# Altium PCB PCB_工训pcb_2_2024-10-31.pcbdoc
Units mm, origin at the board's own origin, x right, y up, seen from the top; angles counter-clockwise.
Board outline 318.03 x 147.95 mm, 2 copper layers (Top Layer, Bottom Layer); 28 components, 76 nets, 177 pads, 15 vias.
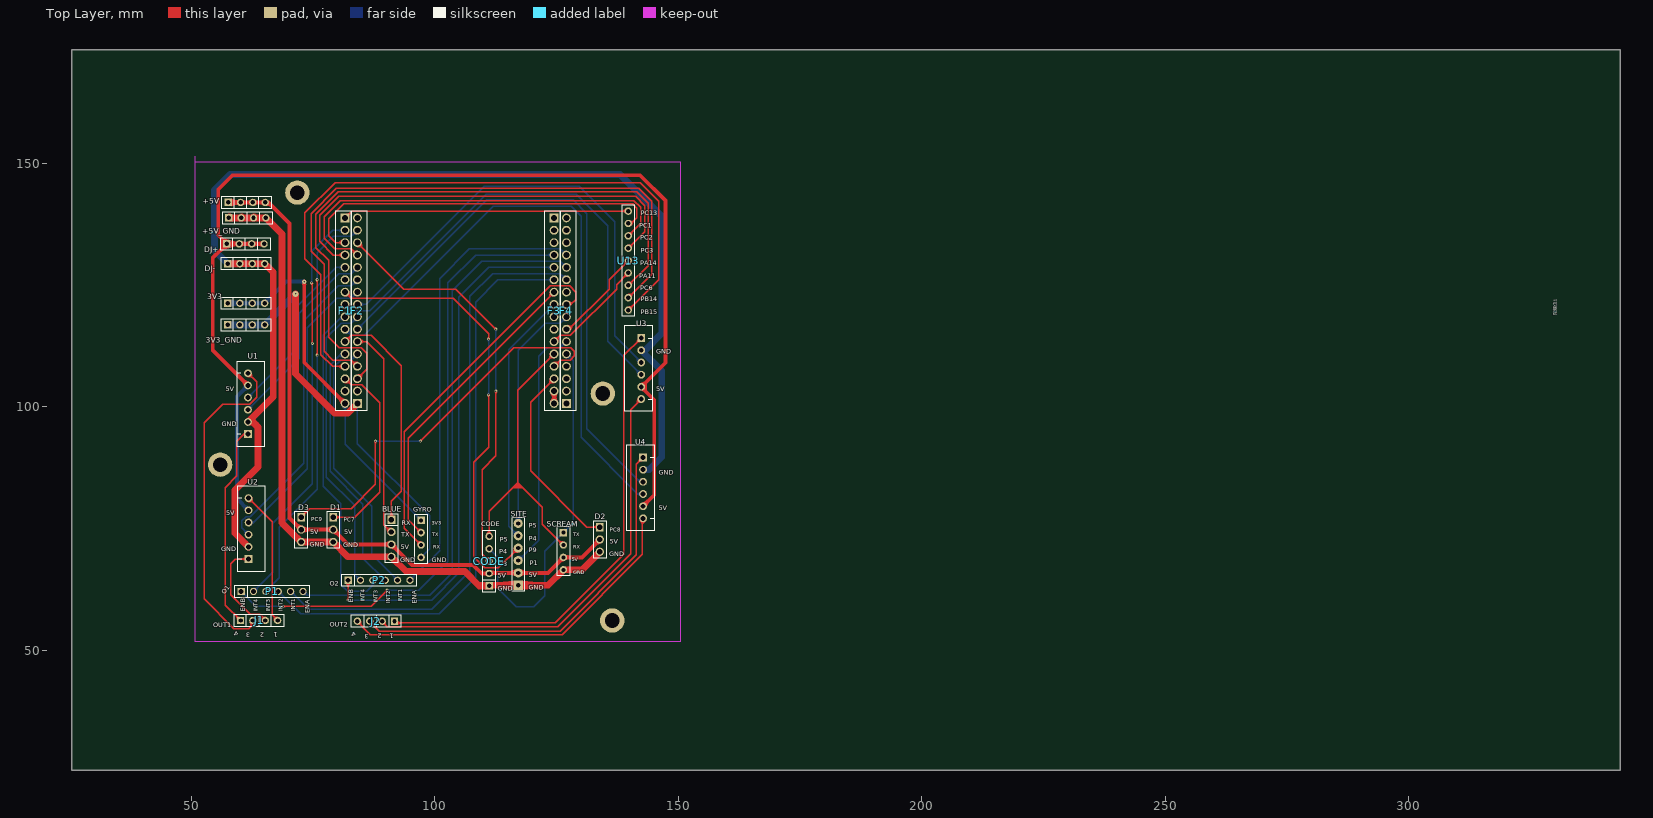
[diagram p0: Top Layer view]
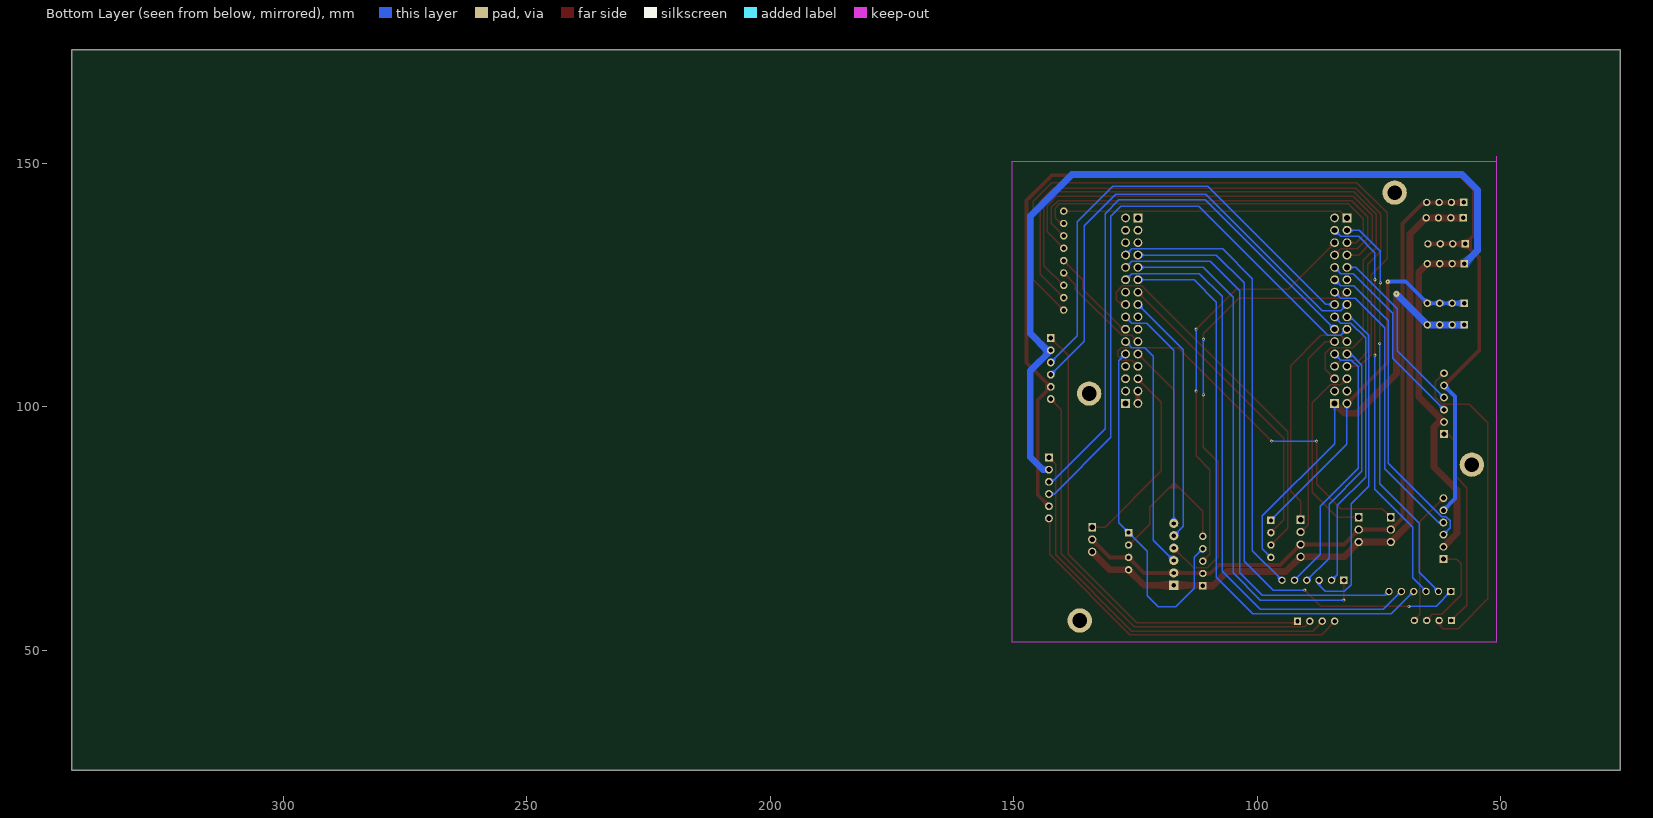
[diagram p1: Bottom Layer view, seen from below]

## Layer stack, top to bottom
Top Layer: signal copper (thickness not stored)
Dielectric: dielectric 0.32, FR-4, Dk 4.8
Bottom Layer: signal copper (thickness not stored)

## Board outline
343.428,25.4 25.4,25.4 25.4,173.355 343.428,173.355

## Components (designator, comment, footprint, x,y, rotation, side; value= is the part's Value field where it differs from the comment)
3V3 "NO" 排针4PIN 56.134,120.015 r90 top
3V3_GND "NO" 排针4PIN 56.134,115.57 r90 top
+5V "排针4Pin" 排针4PIN 56.261,140.716 r90 top
+5V_GND "排针4Pin" 排针4PIN 56.388,137.541 r90 top
BLUE "蓝牙" HDR-TH_4P-P2.54-V-M 91.059,73.025 r270 top
CODE "openmv代码识别" 排针5P 111.125,63.246 r90 top
D1 "排针3P" 排针3P 79.121,74.803 r270 top
D2 "排针3P" 排针3P 133.858,72.771 r270 top
D3 "排针3P" 排针3P 72.517,74.803 r270 top
DJ+ "NO" 排针4PIN 56.007,132.207 r90 top
DJ- "NO" 排针4PIN 56.134,128.143 r90 top
F1 "NO" 排针16P 81.534,136.271 r270 top
F2 "NO" 排针16P 84.074,103.251 r90 top
F3 "NO" 排针16P 124.46,136.271 r270 top
F4 "NO" 排针16P 127,103.251 r90 top
J1 "CONN HEADER 4PIN" 排针4PIN 58.801,54.864 r90 top
J2 "CONN HEADER 4PIN" 排针4PIN 92.964,57.277 r270 top
P1 "排针6P-2.0" 排针6P#1 66.548,62.103 r0 top
P2 "排针6P-2.0" 排针6P#1 88.519,64.389 r0 top
SCREAM "串口屏" 串口屏 126.365,70.358 r270 top
SITE "排针6P" 排针6P#2 118.237,70.993 r180 top
U1 "直流减速电机1" 直流减速电机 64.516,99.949 r270 top
U2 "直流减速电机2" 直流减速电机 64.643,74.295 r270 top
U3 "直流减速电机3" 直流减速电机 139.446,108.585 r90 top
U4 "直流减速电机4" 直流减速电机 139.827,84.074 r90 top
U13 "剩下" 排针9PIN 139.7,140.208 r0 top
陀螺仪1 "NO" 串口屏 97.155,72.898 r270 top
? "" ? 104.14,142.359 r0 top

## Footprints (in the part's own frame and the unit in brackets; to place one, negate y for a bottom-side part, rotate by r counter-clockwise, add the part's x,y. Pads: shape width x height; smd on the part's side, far side on the other; paste and mask are expansions set on the pad)
HDR-TH_4P-P2.54-V-M [mm]
  rect 1.7x1.7 hole 1.1 paste+0 mask+0.051: 1(-3.81,0)
  round 1.7 hole 1.1 paste+0 mask+0.051: 2(-1.27,0) 3(1.27,0) 4(3.81,0)
  silkscreen extent -5.08,-1.27 5.08,1.27
串口屏 [mm]
  rect 1.52x1.52 hole 0.81 paste+0 mask+0.102: 1(-3.81,0)
  round 1.52 hole 0.81 paste+0 mask+0.102: 2(-1.27,0) 3(1.27,0) 4(3.81,0)
  silkscreen extent -5.08,-1.27 5.08,1.27
排针3P [mm]
  rect 1.7x1.524 hole 1.1 paste+0 mask+0.102: 1(-2.54,0)
  round 1.7 hole 1.1 paste+0 mask+0.102: 2(0,0) 3(2.54,0)
  silkscreen extent -3.81,-1.27 3.81,1.27
排针4PIN [mil]
  rect 60x60 hole 36 paste+0 mask+4: 1(50,-50)
  round 60 hole 36 paste+0 mask+4: 2(50,-150) 3(50,-250)
  round 60 hole 36 paste+0 mask+2: 4(50,-350)
  silkscreen extent 0,-400 100,0
排针5P [mil]
  rect 60x60 hole 35.43 paste+0 mask+2: 1(0,0)
  round 60 hole 35.43 paste+0 mask+2: 2(100,0) 3(200,0) 4(300,0)
  round 60 hole 35.43 paste+0 mask+4: 5(400,0)
  silkscreen extent -50,-50 450,50
排针6P#1 [mm]
  rect 1.5x1.5 hole 1 paste+0 mask+0.051: 1(-6.35,0)
  round 1.5 hole 1 paste+0 mask+0.051: 2(-3.81,0) 3(-1.27,0) 4(1.27,0) 5(3.81,0) 6(6.35,0)
  silkscreen extent -7.62,-1.27 7.62,1.27
排针6P#2 [mm]
  rect 1.88x1.88 hole 0.864 paste+0 mask+0.102: 1(1.143,7.62)
  round 1.88 hole 0.864 paste+0 mask+0.102: 2(1.143,5.08) 3(1.143,2.54) 4(1.143,0) 5(1.143,-2.54) 6(1.143,-5.08)
  silkscreen extent -0.13,-6.35 2.41,8.89
排针9PIN [mil]
  round 60 hole 36 paste+0 mask+2: 1(0,0) 2(0,-100) 3(0,-200) 4(0,-300) 5(0,-400) 6(0,-500) 7(0,-600) 8(0,-700) 9(0,-800)
  silkscreen extent -50,-850 50,50
排针16P [mm]
  rect 1.8x1.8 hole 1.2 paste+0 mask+0.051: 1(-2.54,0)
  round 1.8 hole 1.2 paste+0 mask+0.051: 2(0,0) 3(2.54,0) 4(5.08,0) 5(7.62,0) 6(10.16,0) 7(12.7,0) 8(15.24,0) 9(17.78,0) 10(20.32,0) 11(22.86,0) 12(25.4,0) 13(27.94,0) 14(30.48,0) 15(33.02,0) 16(35.56,0)
  silkscreen extent -3.94,-2.03 36.96,1.4
直流减速电机 [mm]
  rect 1.6x1.6 hole 1 paste+0 mask+0.051: 1(5.535,-2.921)
  round 1.6 hole 1 paste+0 mask+0.051: 2(3.035,-2.921) 3(0.535,-2.921) 4(-1.965,-2.921) 5(-4.465,-2.921) 6(-6.965,-2.921)
  silkscreen extent -9.46,-5.27 8.03,0.53
? [mm]

## Free pads (board coordinates)
  round 5 hole 3 paste+0 mask+0.051: 1(55.88,88.138) 1(71.755,144.018) 1(134.493,102.743) 1(136.398,56.134)

## Via types
v1: diameter 0.62, hole 0.31, Top Layer to Bottom Layer, tented both sides, 13 vias
v2: diameter 0.9, hole 0.31, Top Layer to Bottom Layer, tented both sides, 1 vias
v3: diameter 1.2, hole 0.31, Top Layer to Bottom Layer, tented both sides, 1 vias

## Nets (pads, with @x,y where several pads share a name; then routed paths per layer and width w, separated by ;. In a path a pad name is that pad's centre, name@x,y a point inside that pad or via, vN(x,y) a via of type N, cw(c..) or ccw(c..) an arc to the next point about the centre after c; other vN are vias at no path point)
0: pad.1@71.755,144.018
3V3: F3.1
5V: F3.15 F3.16 | length 2.5
  Top Layer w0.8: F3.16 F3.15
B0T0: F3.2
B0T1: F4.15
DJ+5V: DJ+.1 DJ+.2 DJ+.3 DJ+.4 U1.5 U2.5 U3.5 U4.5 | length 242.5
  Top Layer w0.8: U1.5 54.356,111.653 54.356,130.556 DJ+.1 ; DJ+.4 DJ+.3 DJ+.2 DJ+.1 ; U4.5 145.034,81.896 145.034,101.453 U3.5 147.32,109.074 147.32,142.367 142.113,147.574 58.423,147.574 55.499,144.656 55.499,144.145 55.499,135.255 DJ+.1
  Bottom Layer w0.8: U1.5 59.309,102.127 59.309,81.173 U2.5
DJ_GND: DJ-.1 DJ-.2 DJ-.3 DJ-.4 U1.2 U2.2 U3.2 U4.2 | length 244.4
  Top Layer w1.4: DJ-.1 DJ-.2 DJ-.3 DJ-.4 66.802,127.635 66.802,102.121 U1.2 62.598,96.914 63.627,95.885 63.627,87.63 58.928,82.931 58.928,74.054 U2.2
  Bottom Layer w1.4: DJ-.1 54.737,132.08 54.737,144.526 57.912,147.701 138.049,147.701 146.558,139.192 146.558,115.062 143.116,111.62 U3.2 146.558,107.429 146.558,89.662 144.005,87.109 U4.2
F1_15: F1.15
F1_16: 3V3.1 3V3.2 3V3.3 3V3.4 F1.16 陀螺仪1.1 | length 76.6
  Top Layer w0.8: v2(73.152,125.73) 73.152,109.093 F1.16
  Bottom Layer w0.3: F1.16 81.534,92.329 陀螺仪1.1
  Bottom Layer w0.8: 3V3.1 3V3.2 3V3.3 3V3.4 69.469,125.73 v2(73.152,125.73)
F2_2: F2.2
F3_3: F3.3
F4_1: F4.1
F4_2: F4.2
F4_3: F4.3
F4_4: F4.4
F4_14: F4.14
F4_16: F4.16
GND: 3V3_GND.1 3V3_GND.2 3V3_GND.3 3V3_GND.4 F2.1 陀螺仪1.4 | length 88.4
  Top Layer w1.4: v3(71.374,123.19) 71.374,106.807 79.502,98.679 82.042,98.679 F2.1
  Bottom Layer w0.3: F2.1 84.074,92.456 98.933,77.597 98.933,70.866 陀螺仪1.4
  Bottom Layer w1.4: 3V3_GND.1 3V3_GND.2 3V3_GND.3 3V3_GND.4 v3(71.374,123.19)
OT1_1: J1.4 U2.6 | length 27.6
  Top Layer w0.3: U2.6 66.548,76.434 66.548,57.277 J1.4
OT1_2: J1.3 U2.1 | length 19.8
  Top Layer w0.3: U2.1 58.981,68.76 58.039,67.818 58.039,61.468 62.103,57.404 64.008,57.404 65.151,56.261 J1.3
OT1_3: J1.2 U1.6 | length 68.5
  Top Layer w0.3: U1.6 63.373,105.136 63.373,101.981 61.976,100.584 56.388,100.584 52.578,96.774 52.578,60.579 58.674,54.483 61.722,54.483 62.611,55.372 J1.2
OT1_4: J1.1 U1.1 | length 42
  Top Layer w0.3: J1.1 56.896,59.309 56.896,83.439 59.309,85.852 59.309,92.964 60.759,94.414 U1.1
OT2_1: J2.1 U3.1 | length 99.7
  Top Layer w0.3: J2.1@91.44,56.134 J2.1@91.948,55.626 ; J2.1 92.075,55.626 124.714,55.626 138.811,69.723 138.811,110.564 U3.1
OT2_2: J2.2 U3.6 | length 90.7
  Top Layer w0.3: J2.2@88.9,56.134 90.17,54.864 125.222,54.864 140.208,69.85 140.208,99.462 U3.6
OT2_3: J2.3 U4.1 | length 82.9
  Top Layer w0.3: J2.3@86.36,56.134 88.519,53.975 125.73,53.975 141.351,69.596 141.351,88.212 U4.1
OT2_4: J2.4 U4.6 | length 74.3
  Top Layer w0.3: J2.4@83.82,56.134 86.741,53.213 126.111,53.213 142.621,69.723 142.621,76.982 U4.6
PA0: F2.12 U1.3 | length 40
  Bottom Layer w0.3: U1.3 72.136,109.954 72.136,119.253 80.264,127.381 82.804,127.381 F2.12
PA1: F1.5 U1.4 | length 36
  Bottom Layer w0.3: U1.4 71.247,111.564 71.247,120.142 79.756,128.651 F1.5
PA2: F2.11 U2.3 | length 64.9
  Bottom Layer w0.3: U2.3 60.325,75.159 60.325,76.581 61.214,77.47 62.103,77.47 73.025,88.392 73.025,117.729 80.137,124.841 82.804,124.841 F2.11
PA3: F1.6
PA4: F2.10 U2.4 | length 58.9
  Bottom Layer w0.3: U2.4 62.799,76.261 73.787,87.249 73.787,116.205 79.883,122.301 82.804,122.301 F2.10
PA5: F1.7 SITE.4 | length 91.9
  Top Layer w0.3: F1.7 82.804,122.301 103.759,122.301 110.998,115.062 v1(110.998,113.919) ; v1(110.998,102.489) 110.998,91.694 107.95,88.646 107.95,69.215 110.236,66.929 113.03,66.929 SITE.4
  Bottom Layer w0.3: v1(110.998,102.489) v1(110.998,113.919)
PA6: F2.9 U3.3 | length 97.1
  Bottom Layer w0.3: F2.9 85.852,121.031 110.109,145.288 129.667,145.288 136.906,138.049 136.906,114.581 U3.3
PA7: F1.8 U3.4 | length 100.5
  Bottom Layer w0.3: F1.8 82.804,119.761 86.614,119.761 110.49,143.637 129.032,143.637 135.509,137.16 135.509,113.478 U3.4
PA9: CODE.5 F3.12 SCREAM.2 | length 59.7
  Top Layer w0.3: CODE.5 111.125,78.613 116.967,84.455 ; F3.12 116.967,103.378 116.967,84.455 ; SCREAM.2 122.047,75.946 122.047,79.375 116.967,84.455
PA10: CODE.4 F4.5 SCREAM.1 | length 73.7
  Bottom Layer w0.3: CODE.4 112.903,69.088 112.903,62.738 116.713,58.928 120.269,58.928 122.555,61.214 122.555,70.358 SCREAM.1 128.397,76.2 128.397,109.474 F4.5
PA11: F3.11 U13.6 | length 21.6
  Top Layer w0.3: F3.11 125.73,114.681 127.762,114.681 137.287,124.206 137.287,125.095 U13.6
PA12: F4.6 SITE.3 | length 50.6
  Bottom Layer w0.3: SITE.3 121.285,72.644 121.285,110.363 123.063,112.141 125.73,112.141 F4.6
PA13: F3.10
PA14: F4.7 U13.5 | length 19.7
  Top Layer w0.3: F4.7 127.508,115.951 135.763,124.206 135.763,126.111 U13.5
PA15: F3.9
PB0: F2.7 U4.3 | length 119.5
  Bottom Layer w0.3: F2.7 110.617,142.494 128.397,142.494 131.191,139.7 131.191,95.504 142.085,84.61 U4.3
PB1: F1.10 U4.4 | length 123.9
  Bottom Layer w0.3: F1.10 82.804,114.681 85.471,114.681 112.014,141.224 128.016,141.224 130.048,139.192 130.048,93.726 141.666,82.108 U4.4
PB3: F4.10
PB4: F3.6 P1.4 | length 120
  Bottom Layer w0.3: P1.4 72.39,57.531 100.838,57.531 108.331,65.024 108.331,121.539 112.903,126.111 F3.6
PB5: F4.11 P1.5 | length 120.3
  Bottom Layer w0.3: P1.5 74.041,58.42 99.314,58.42 107.188,66.294 107.188,122.682 111.887,127.381 125.73,127.381 F4.11
PB6: F3.5 P2.1 | length 107.8
  Top Layer w0.3: v1(82.169,60.325) P2.1
  Bottom Layer w0.3: v1(82.169,60.325) 99.314,60.325 104.902,65.913 104.902,122.555 110.998,128.651 F3.5
PB7: F4.12 P1.6 | length 117.3
  Bottom Layer w0.3: P1.6 73.66,61.341 98.933,61.341 103.505,65.913 103.505,123.825 109.601,129.921 125.73,129.921 F4.12
PB8: F3.4 P1.1 | length 128.9
  Top Layer w0.3: v1(68.834,59.055) 86.868,59.055 v1(90.17,62.357)
  Bottom Layer w0.3: P1.1 63.246,59.055 v1(68.834,59.055) ; v1(90.17,62.357) 96.647,62.357 102.616,68.326 102.616,125.476 108.331,131.191 F3.4
PB9: F4.13 P2.6 | length 93.6
  Bottom Layer w0.3: P2.6 100.965,70.485 100.965,126.365 107.061,132.461 125.73,132.461 F4.13
PB10: BLUE.2 F2.6 | length 43.1
  Top Layer w0.3: F2.6 85.979,113.411 89.535,109.855 89.535,75.819 BLUE.2
PB11: BLUE.1 F1.11 | length 47.1
  Top Layer w0.3: F1.11 82.804,114.681 86.868,114.681 93.091,108.458 93.091,82.677 91.059,80.645 BLUE.1
PB12: F2.5 P2.5 | length 55.2
  Bottom Layer w0.3: F2.5 82.804,109.601 80.645,109.601 79.248,108.204 79.248,87.376 86.995,79.629 86.995,69.723 P2.5
PB13: F1.12 P2.4 | length 52.9
  Bottom Layer w0.3: F1.12 80.772,110.871 78.486,108.585 78.486,86.741 85.217,80.01 85.217,68.961 P2.4
PB14: F2.4 U13.8 | length 132.6
  Top Layer w0.3: F2.4 82.804,109.601 78.994,109.601 77.216,111.379 77.216,129.286 74.549,131.953 74.549,139.7 79.756,144.907 141.859,144.907 144.526,142.24 144.526,127.254 U13.8
PB15: F1.13 U13.9 | length 138.1
  Top Layer w0.3: F1.13 78.994,108.331 76.581,110.744 76.581,127.127 73.279,130.429 73.279,139.827 79.502,146.05 142.113,146.05 145.923,142.24 145.923,126.111 U13.9
PC0: CODE.3 F2.14 | length 85.2
  Top Layer w0.3: F2.14 93.599,124.206 104.267,124.206 v1(112.522,115.951) ; CODE.3 109.728,69.723 109.728,87.122 112.522,89.916 v1(112.522,103.251)
  Bottom Layer w0.3: v1(112.522,103.251) v1(112.522,115.951)
PC1: F1.3 U13.2 | length 76.6
  Top Layer w0.3: F1.3 79.629,133.731 78.232,135.128 78.232,138.684 81.28,141.732 140.589,141.732 141.478,140.843 141.478,138.811 140.335,137.668 U13.2
PC2: F2.13 U13.3 | length 86.6
  Top Layer w0.3: F2.13 82.804,132.461 79.375,132.461 77.216,134.62 77.216,139.065 80.518,142.367 140.843,142.367 142.24,140.97 142.24,137.668 U13.3
PC3: F1.4 U13.4 | length 91.1
  Top Layer w0.3: F1.4 79.121,131.191 76.327,133.985 76.327,139.319 80.264,143.256 141.224,143.256 143.129,141.351 143.129,136.017 U13.4
PC4: F2.8 P2.2 | length 60.8
  Bottom Layer w0.3: F2.8 82.804,117.221 80.772,117.221 77.724,114.173 77.724,85.598 83.566,79.756 83.566,65.532 P2.2
PC5: F1.9 P2.3 | length 67.4
  Bottom Layer w0.3: F1.9 80.899,118.491 77.089,114.681 77.089,83.693 80.645,80.137 80.645,63.5 82.042,62.103 85.979,62.103 87.249,63.373 P2.3
PC6: F2.3 U13.7 | length 131.1
  Top Layer w0.3: F2.3 85.979,107.696 85.979,110.998 84.836,112.141 80.391,112.141 78.189,114.343 78.189,130.091 75.565,132.715 75.565,139.573 80.137,144.145 141.478,144.145 143.764,141.859 143.764,129.032 U13.7
PC7: D1.1 F1.14 | length 39.2
  Top Layer w0.3: D1.1 83.566,77.343 88.646,82.423 88.646,100.838 84.963,104.521 82.804,104.521 F1.14
PC8: D2.1 F3.14 | length 39.9
  Top Layer w0.3: F3.14 119.634,100.965 119.634,86.868 131.191,75.311 D2.1
PC9: D3.1 F3.13 | length 82
  Top Layer w0.3: D3.1 74.295,79.121 82.804,79.121 87.757,84.074 v1(87.757,92.964) ; v1(97.028,92.964) 116.205,112.141 127.889,112.141 128.651,111.379 128.651,110.49 127.762,109.601 125.73,109.601 F3.13
  Bottom Layer w0.3: v1(87.757,92.964) v1(97.028,92.964)
PC10: F4.8 SITE.6 | length 48.3
  Bottom Layer w0.3: SITE.6 117.094,111.633 122.682,117.221 125.73,117.221 F4.8
PC11: F3.8 SITE.5 | length 52.1
  Bottom Layer w0.3: SITE.5 115.189,75.438 115.189,111.76 F3.8
PC12: F4.9 陀螺仪1.3 | length 76.6
  Top Layer w0.3: 陀螺仪1.3 93.726,75.057 93.726,94.869 123.698,124.841 127.635,124.841 128.905,123.571 128.905,122.047 127.889,121.031 F4.9
PC13: F1.1 U13.1 | length 58.7
  Top Layer w0.3: F1.1 82.931,140.208 U13.1
PC14: F1.2 P1.2 | length 83.5
  Top Layer w0.3: v1(74.676,125.476) 74.803,125.349 v1(74.803,113.03)
  Bottom Layer w0.3: P1.2 66.675,66.04 66.675,76.073 74.803,84.201 v1(74.803,113.03) ; v1(74.676,125.476) 74.676,131.953 78.994,136.271 F1.2
PC15: F2.15 P1.3 | length 84.1
  Top Layer w0.3: v1(75.819,110.617) v1(75.819,126.111)
  Bottom Layer w0.3: P1.3 68.072,64.897 68.072,75.311 75.819,83.058 v1(75.819,110.617) ; v1(75.819,126.111) 75.819,131.699 79.121,135.001 82.804,135.001 F2.15
PD2: F3.7 陀螺仪1.2 | length 62.9
  Top Layer w0.3: 陀螺仪1.2 94.488,76.835 94.488,93.599 F3.7
SCREAM_3: +5V.1 +5V.2 +5V.3 +5V.4 BLUE.3 CODE.2 D1.2 D2.2 D3.2 SCREAM.3 SITE.2 | length 146.3
  Top Layer w0.8: +5V.1 +5V.2 +5V.3 +5V.4 65.786,141.986 70.104,137.668 70.104,77.216 D3.2 D1.2 82.169,71.755 BLUE.3 95.25,67.564 107.823,67.564 109.601,65.786 CODE.2 111.125,65.913 SITE.2 123.19,65.913 SCREAM.3 130.175,69.088 D2.2
SCREAM_4: +5V_GND.1 +5V_GND.2 +5V_GND.3 +5V_GND.4 BLUE.4 CODE.1 D1.3 D2.3 D3.3 SCREAM.4 SITE.1 | length 145.1
  Top Layer w1.4: +5V_GND.1@57.785,139.065 58.039,138.811 +5V_GND.2 ; +5V_GND.2@60.325,139.065 60.579,138.811 +5V_GND.3 ; +5V_GND.3@62.865,139.065 63.119,138.811 +5V_GND.4 68.58,135.509 68.58,76.2 D3.3 D1.3 82.169,69.215 BLUE.4 94.107,66.167 106.172,66.167 109.093,63.246 CODE.1 111.125,63.373 SITE.1 123.19,63.373 SCREAM.4 130.175,66.548 D2.3
VB: F2.16

## Polygon pours and split planes (outlines as drawn)
DJ_GND on Top Layer (solid): 152.527,47.244 153.543,47.244 154.178,46.609 45.466,46.609 45.466,157.607 48.514,160.655 156.972,160.655 159.639,157.988
GND on Bottom Layer (solid): 39.497,39.497 38.1,38.1 38.1,151.13 44.945,157.975 44.831,157.988 45.974,157.988 46.355,158.369 46.355,158.242 46.101,157.988 155.575,157.988 155.956,158.369 155.956,47.625 164.084,39.497 39.497,39.497
DJ_GND on Bottom Layer (solid): 48.895,154.432 156.591,154.432 156.591,38.862 157.226,38.227 46.863,38.227 42.799,42.291

## Other copper
Top Layer:
  region net OT2_3: 142.48,88.809 141.948,89.338 141.789,88.861 142.001,88.65
  region net OT2_1: 142.096,113.32 141.567,113.851 141.408,113.373 141.619,113.16
  region net OT1_2: 60.922,68.385 60.922,69.135 60.472,68.91 60.472,68.61
  region net OT1_4: 60.795,94.039 60.795,94.789 60.759,94.564 60.759,94.264
  region net PB6: 82.544,63.639 81.794,63.639 82.019,63.189 82.319,63.189
  region net PC13: 81.903,139.71 82.433,139.18 82.592,139.657 82.38,139.869
  region net PC9: 72.995,78.194 73.279,77.5 73.51,78.124 73.387,78.425
  region net PC8: 133.096,74.936 133.096,75.686 132.646,75.461 132.646,75.161
  region net PC7: 79.883,77.718 79.883,76.968 80.333,77.193 80.333,77.493
  region net SCREAM_4: 110.363,62.484 110.363,64.008 109.093,63.946 109.093,62.546
  region net PB11: 90.684,77.685 91.434,77.685 91.209,78.135 90.909,78.135
  region net OT2_1: 92.456,56.001 92.456,55.251 92.906,55.476 92.906,55.776
  region net OT1_4: 59.309,56.366 59.839,56.896 59.362,57.055 59.15,56.843
  region net SCREAM_4: 58.42,139.573 58.42,138.049 60.198,138.111 60.198,139.511
  region net SCREAM_3: 58.293,142.748 58.293,141.224 59.493,141.586 59.493,142.386
  region net DJ+5V: 56.515,132.825 57.929,134.239 56.656,134.663 56.091,134.098
  region net DJ+5V: 57.929,132.715 56.515,134.129 56.091,132.856 56.656,132.291
  region net DJ+5V: 58.039,134.239 58.039,132.715 59.239,133.077 59.239,133.877
  region net SCREAM_4: 116.154,62.433 116.154,64.313 114.054,64.073 114.054,62.673
  region net SCREAM_4: 118.034,64.313 118.034,62.433 120.134,62.673 120.134,64.073
  region net F1_16: 73.49,125.432 72.814,125.432 72.752,125.117 73.552,125.117
  region net PC9: 97.337,92.945 97.009,93.273 97.22,93.369 97.433,93.156
  region net PC9: 87.524,92.759 87.99,92.759 87.907,92.542 87.607,92.542
  region net PC14: 74.57,113.235 75.036,113.235 74.953,113.452 74.653,113.452
  region net PC15: 75.586,110.822 76.052,110.822 75.969,111.039 75.669,111.039
  region net PC14: 74.516,125.21 74.959,125.35 74.953,125.121 74.653,125.026
  region net PC15: 75.586,125.906 76.052,125.906 75.969,125.689 75.669,125.689
  region net PC0: 112.289,103.046 112.755,103.046 112.672,102.829 112.372,102.829
  region net PA5: 110.765,102.284 111.231,102.284 111.148,102.067 110.848,102.067
  region net PC0: 112.541,116.26 112.213,115.932 112.117,116.143 112.33,116.356
  region net PA5: 110.765,114.124 111.231,114.124 111.148,114.341 110.848,114.341
  region net PB8: 90.189,62.048 89.861,62.376 89.765,62.165 89.978,61.952
  region net PB8: 69.039,58.822 69.039,59.288 69.256,59.205 69.256,58.905
  region net PB6: 81.936,60.53 82.402,60.53 82.319,60.747 82.019,60.747
  region net PB15: 139.652,120.649 140.461,119.84 140.54,120.515 140.327,120.728
  region net PB14: 139.652,123.189 140.461,122.38 140.54,123.055 140.327,123.268
  region net PC6: 139.652,125.729 140.461,124.92 140.54,125.595 140.327,125.808
  region net PA11: 138.939,127.556 139.748,126.747 139.073,126.668 138.86,126.881
  region net PA14: 138.939,130.096 139.748,129.287 139.073,129.208 138.86,129.421
  region net PC3: 139.652,133.349 140.461,132.54 140.54,133.215 140.327,133.428
  region net PC2: 139.652,135.889 140.461,135.08 140.54,135.755 140.327,135.968
  region net PC1: 140.365,137.296 139.986,138.374 140.624,138.169 140.734,137.855
  region net PC13: 139.196,139.636 139.196,140.779 138.663,140.358 138.663,140.058
  region net OT2_4: 143.282,76.514 142.09,76.653 142.471,76.045 142.771,76.01
  region net DJ+5V: 142.697,80.408 143.546,79.559 143.8,80.097 143.235,80.662
  region net OT2_2: 141.568,101.67 142.417,100.822 141.702,100.744 141.49,100.956
  region net DJ+5V: 142.316,104.919 143.165,104.07 143.419,104.608 142.854,105.173
  region net DJ+5V: 142.316,103.322 143.165,104.17 143.419,103.633 142.854,103.067
  region net OT1_1: 61.672,80.462 62.521,81.31 62.598,80.595 62.386,80.383
  region net OT1_3: 61.545,106.115 62.394,106.964 62.472,106.25 62.26,106.038
  region net DJ+5V: 60.797,104.364 61.646,105.212 61.108,105.467 60.543,104.901
  region net PD2: 96.396,74.12 97.203,74.927 96.529,75.006 96.317,74.794
  region net PC12: 96.396,71.58 97.203,72.387 96.529,72.466 96.317,72.254
  region net PA9: 125.606,71.58 126.413,72.387 125.739,72.466 125.527,72.254
  region net SCREAM_3: 126.868,68.518 126.868,69.658 127.4,69.488 127.4,68.688
  region net SCREAM_3: 125.606,69.136 126.413,68.329 125.916,68.074 125.351,68.639
  region net SCREAM_4: 126.868,65.978 126.868,67.118 127.4,67.248 127.4,65.848
  region net SCREAM_4: 125.606,66.596 126.413,65.789 126.128,65.321 125.138,66.311
  region net PC12: 127.742,120.522 127.412,121.831 128.146,121.5 128.231,121.161
  region net PA14: 127.842,115.634 127.209,116.826 128.009,116.664 128.156,116.387
  region net 5V: 125.135,101.306 123.785,101.306 124.06,101.936 124.86,101.936
  region net 5V: 125.135,102.656 123.785,102.656 124.06,102.026 124.86,102.026
  region net PC8: 123.562,105.847 124.516,104.893 123.7,104.819 123.488,105.031
  region net PC9: 124.404,109.229 125.358,108.275 125.432,109.091 125.22,109.303
  region net PA9: 123.562,110.927 124.516,109.973 123.7,109.899 123.488,110.111
  region net PA11: 124.404,114.309 125.358,113.355 125.432,114.171 125.22,114.383
  region net PD2: 123.562,123.627 124.516,122.673 123.7,122.599 123.488,122.811
  region net PC0: 84.018,132.833 84.972,133.787 85.046,132.971 84.834,132.759
  region net PC2: 83.176,131.135 84.13,132.089 83.314,132.163 83.102,131.951
  region net PB10: 84.669,112.736 84.669,114.086 85.299,113.561 85.299,113.261
  region net PB14: 83.176,108.275 84.13,109.229 83.314,109.303 83.102,109.091
  region net PC6: 84.018,106.689 84.972,105.735 85.046,106.551 84.834,106.763
  region net F1_16: 80.636,100.655 81.59,101.609 80.95,101.86 80.385,101.295
  region net PC7: 81.478,104.893 82.432,105.847 82.506,105.031 82.294,104.819
  region net PB15: 80.939,107.656 80.939,109.006 80.309,108.481 80.309,108.181
  region net PB11: 81.478,114.309 82.432,113.355 82.506,114.171 82.294,114.383
  region net PA5: 81.478,122.673 82.432,123.627 82.506,122.811 82.294,122.599
  region net PC3: 80.939,130.516 80.939,131.866 80.309,131.341 80.309,131.041
  region net PC1: 80.939,133.056 80.939,134.406 80.309,133.881 80.309,133.581
  region net SCREAM_4: 71.669,72.21 72.57,73.111 72.194,73.576 71.204,72.586
  region net SCREAM_4: 73.079,71.626 73.079,72.9 73.674,72.963 73.674,71.563
  region net SCREAM_3: 71.669,74.75 72.57,75.651 71.982,75.904 71.416,75.338
  region net SCREAM_3: 73.079,74.166 73.079,75.44 73.674,75.203 73.674,74.403
  region net SCREAM_4: 133.01,70.284 133.911,69.383 133.535,68.918 132.545,69.908
  region net SCREAM_3: 133.01,72.824 133.911,71.923 133.323,71.67 132.757,72.236
  region net SCREAM_4: 79.068,71.415 79.969,72.316 80.434,71.94 79.444,70.95
  region net SCREAM_4: 78.559,71.626 78.559,72.9 77.964,72.963 77.964,71.563
  region net SCREAM_3: 79.068,73.955 79.969,74.856 80.222,74.268 79.656,73.702
  region net SCREAM_3: 78.559,74.166 78.559,75.44 77.964,75.203 77.964,74.403
  region net PA9: 111.697,73.91 110.553,73.91 110.975,74.443 111.275,74.443
  region net PC0: 110.364,68.278 111.173,69.087 110.498,69.166 110.285,68.953
  region net SCREAM_3: 111.695,65.28 111.555,66.415 112.105,66.313 112.204,65.513
  region net SCREAM_3: 110.621,65.215 110.621,66.358 110.088,66.186 110.088,65.386
  region net SCREAM_4: 90.497,68.578 90.497,69.852 89.902,69.915 89.902,68.515
  region net SCREAM_4: 91.006,68.367 91.907,69.268 92.372,68.892 91.382,67.902
  region net SCREAM_3: 90.497,71.118 90.497,72.392 89.902,72.155 89.902,71.355
  region net SCREAM_3: 91.006,70.907 91.907,71.808 92.16,71.22 91.594,70.654
  region net PB10: 90.211,74.242 91.112,75.143 90.347,75.219 90.135,75.007
  region net OT2_4: 84.836,55.989 83.961,55.253 84.626,55.116 84.857,55.31
  region net OT2_3: 87.376,55.989 86.501,55.253 87.166,55.116 87.397,55.31
  region net OT2_2: 89.916,55.989 89.041,55.253 89.706,55.116 89.937,55.31
  region net OT1_1: 66.93,56.086 67.739,56.895 67.064,56.974 66.851,56.761
  region net OT1_2: 65.264,56.888 64.389,56.152 64.368,56.831 64.599,57.025
  region net OT1_3: 63.047,55.509 61.936,55.78 62.195,55.168 62.536,55.085
  region net SCREAM_4: 64.774,138.239 64.774,139.382 64.241,139.511 64.241,138.111
  region net SCREAM_4: 65.23,138.05 66.039,138.859 66.507,138.572 65.517,137.582
  region net SCREAM_4: 63.242,138.239 63.242,139.382 63.775,139.511 63.775,138.111
  region net SCREAM_4: 62.234,138.239 62.234,139.382 61.701,139.511 61.701,138.111
  region net SCREAM_4: 60.702,138.239 60.702,139.382 61.235,139.511 61.235,138.111
  region net SCREAM_4: 59.694,138.239 59.694,139.382 59.161,139.511 59.161,138.111
  region net SCREAM_3: 64.647,141.415 64.647,142.558 64.114,142.386 64.114,141.586
  region net SCREAM_3: 65.816,142.358 65.437,141.28 65.983,141.224 66.277,142.061
  region net SCREAM_3: 63.115,141.415 63.115,142.558 63.648,142.386 63.648,141.586
  region net SCREAM_3: 62.107,141.415 62.107,142.558 61.574,142.386 61.574,141.586
  region net SCREAM_3: 60.575,141.415 60.575,142.558 61.108,142.386 61.108,141.586
  region net SCREAM_3: 59.567,141.415 59.567,142.558 59.034,142.386 59.034,141.586
  region net DJ+5V: 64.393,132.905 64.393,134.048 63.86,133.877 63.86,133.077
  region net DJ+5V: 61.853,132.905 61.853,134.048 61.32,133.877 61.32,133.077
  region net DJ+5V: 62.861,132.905 62.861,134.048 63.394,133.877 63.394,133.077
  region net DJ+5V: 59.313,132.905 59.313,134.048 58.78,133.877 58.78,133.077
  region net DJ+5V: 60.321,132.905 60.321,134.048 60.854,133.877 60.854,133.077
  region net SCREAM_3: 116.472,65.208 116.472,66.618 115.815,66.313 115.815,65.513
  region net SCREAM_3: 117.716,65.208 117.716,66.618 118.373,66.313 118.373,65.513
  region net PA5: 116.156,71.052 117.153,70.055 116.295,69.982 116.083,70.194
  region net DJ+5V: 142.112,104.247 142.114,104.247 143.52,105.654 143.52,102.88 143.5,102.86 142.112,104.247
  region net DJ+5V: 55.88,132.08 55.88,134.874 57.277,133.477 55.88,132.08
  region net PA9: 115.76,83.248 116.967,84.455 118.173,83.248 115.76,83.248
Bottom Layer:
  region net F1_16: 96.395,76.938 96.925,77.468 96.448,77.627 96.236,77.415
  region net PA10: 126.595,74.928 127.125,74.398 127.284,74.875 127.072,75.087
  region net PA10: 126.135,73.408 125.605,73.938 125.446,73.461 125.658,73.249
  region net PB8: 60.948,61.883 60.418,61.353 60.895,61.194 61.107,61.406
  region net F1_16: 58.166,122.047 58.166,120.523 59.366,120.885 59.366,121.685
  region net F1_16: 72.854,125.392 72.854,126.068 72.539,126.13 72.539,125.33
  region net PC9: 96.823,92.731 96.823,93.197 96.606,93.114 96.606,92.814
  region net PC9: 87.962,92.731 87.962,93.197 88.179,93.114 88.179,92.814
  region net PC14: 74.57,112.825 75.036,112.825 74.953,112.608 74.653,112.608
  region net PC15: 75.586,110.412 76.052,110.412 75.969,110.195 75.669,110.195
  region net PC14: 74.443,125.681 74.909,125.681 74.826,125.898 74.526,125.898
  region net PC15: 75.586,126.316 76.052,126.316 75.969,126.533 75.669,126.533
  region net PC0: 112.289,103.456 112.755,103.456 112.672,103.673 112.372,103.673
  region net PA5: 110.765,102.694 111.231,102.694 111.148,102.911 110.848,102.911
  region net PC0: 112.289,115.746 112.755,115.746 112.672,115.529 112.372,115.529
  region net PA5: 110.765,113.714 111.231,113.714 111.148,113.497 110.848,113.497
  region net PB8: 90.375,62.124 90.375,62.59 90.592,62.507 90.592,62.207
  region net PB8: 68.629,58.822 68.629,59.288 68.412,59.205 68.412,58.905
  region net PB6: 82.374,60.092 82.374,60.558 82.591,60.475 82.591,60.175
  region net PB1: 142.219,81.509 142.218,82.709 141.666,82.258 141.666,81.958
  region net PB0: 142.45,85.352 142.048,84.221 141.666,84.817 141.777,85.13
  region net PA7: 141.568,106.57 142.417,107.418 141.702,107.496 141.49,107.284
  region net PA6: 141.568,109.07 142.417,109.919 141.702,109.996 141.49,109.784
  region net DJ+5V: 60.924,78.71 61.773,79.558 61.235,79.813 60.67,79.247
  region net PA4: 62.252,75.66 62.251,76.86 62.799,76.411 62.799,76.111
  region net PA2: 60.924,73.71 61.773,74.558 61.058,74.636 60.846,74.424
  region net DJ+5V: 60.797,104.464 61.646,103.615 61.108,103.361 60.543,103.926
  region net PA1: 61.545,102.712 62.394,101.865 62.471,102.579 62.259,102.791
  region net PA0: 61.546,100.212 62.394,99.364 62.472,100.078 62.26,100.29
  region net PC4: 83.96,64.342 84.756,65.138 84.093,65.217 83.881,65.005
  region net PC5: 87.811,63.893 86.687,63.893 87.099,63.373 87.399,63.373
  region net PB13: 89.04,64.342 89.836,65.138 89.173,65.217 88.961,65.005
  region net PB12: 91.58,64.342 92.376,65.138 91.713,65.217 91.501,65.005
  region net PB9: 94.822,65.138 95.618,64.342 95.697,65.005 95.485,65.217
  region net PC14: 62.691,62.852 63.487,62.056 63.566,62.719 63.354,62.931
  region net PC15: 65.231,62.852 66.027,62.056 66.106,62.719 65.894,62.931
  region net PB4: 67.771,61.354 68.567,62.15 68.646,61.487 68.434,61.275
  region net PB5: 70.311,61.354 71.107,62.15 71.186,61.487 70.974,61.275
  region net PB7: 72.851,61.354 73.647,62.15 73.726,61.487 73.514,61.275
  region net PB9: 126.102,131.135 127.056,132.089 126.24,132.163 126.028,131.951
  region net PB7: 126.102,128.595 127.056,129.549 126.24,129.623 126.028,129.411
  region net PB5: 126.102,126.055 127.056,127.009 126.24,127.083 126.028,126.871
  region net PC10: 126.102,118.547 127.056,117.593 126.24,117.519 126.028,117.731
  region net PA12: 126.102,113.467 127.056,112.513 126.24,112.439 126.028,112.651
  region net PA10: 126.944,109.973 127.898,110.927 127.972,110.111 127.76,109.899
  region net PC11: 123.562,121.087 124.516,120.133 123.7,120.059 123.488,120.271
  region net PB4: 123.865,125.436 123.865,126.786 123.235,126.261 123.235,125.961
  region net PB6: 123.865,127.976 123.865,129.326 123.235,128.801 123.235,128.501
  region net PB8: 123.865,130.516 123.865,131.866 123.235,131.341 123.235,131.041
  region net PC15: 83.176,136.327 84.13,135.373 83.314,135.299 83.102,135.511
  region net PA0: 83.176,128.707 84.13,127.753 83.314,127.679 83.102,127.891
  region net PA2: 83.176,126.167 84.13,125.213 83.314,125.139 83.102,125.351
  region net PA4: 83.176,123.627 84.13,122.673 83.314,122.599 83.102,122.811
  region net PA6: 84.669,120.356 84.669,121.706 85.299,121.181 85.299,120.881
  region net PC4: 83.176,118.547 84.13,117.593 83.314,117.519 83.102,117.731
  region net PB0: 84.018,116.849 84.972,115.895 85.046,116.711 84.834,116.923
  region net PB12: 83.176,110.927 84.13,109.973 83.314,109.899 83.102,110.111
  region net F1_16: 82.209,100.116 80.859,100.116 81.384,99.486 81.684,99.486
  region net PB13: 81.19,110.039 80.752,111.317 80.321,110.632 80.429,110.316
  region net PB1: 81.478,115.053 82.432,116.007 82.506,115.191 82.294,114.979
  region net PC5: 81.257,117.635 80.719,118.873 80.346,118.15 80.475,117.855
  region net PA7: 81.478,120.133 82.432,121.087 82.506,120.271 82.294,120.059
  region net PA1: 80.939,127.976 80.939,129.326 80.309,128.801 80.309,128.501
  region net PC14: 80.939,135.596 80.939,136.946 80.309,136.421 80.309,136.121
  region net PA10: 111.077,70.105 111.886,70.914 111.965,70.239 111.752,70.026
  region net F1_16: 64.976,122.046 65.785,121.237 66.04,121.736 65.475,122.301
  region net F1_16: 64.52,120.713 64.52,121.856 63.987,121.685 63.987,120.885
  region net F1_16: 62.988,120.713 62.988,121.856 63.521,121.685 63.521,120.885
  region net F1_16: 61.98,120.713 61.98,121.856 61.447,121.685 61.447,120.885
  region net F1_16: 60.448,120.713 60.448,121.856 60.981,121.685 60.981,120.885
  region net F1_16: 59.44,120.713 59.44,121.856 58.907,121.685 58.907,120.885
  region net PA12: 117.035,69.391 118.032,68.394 118.105,69.252 117.893,69.464
  region net PC11: 116.156,73.474 117.153,74.471 116.295,74.544 116.083,74.332
  region net PC10: 117.799,76.695 116.389,76.695 116.944,77.352 117.244,77.352

## Silkscreen, mask and mechanical layers (free items; w line width, h text height)
Top Overlay:
  text "PC13" at 142.24,139.327 h1
  text "PC1" at 141.986,136.787 h1
  text "PC2" at 142.113,134.374 h1
  text "PC3" at 142.24,131.707 h1
  text "PA14" at 142.113,129.04 h1
  text "PA11" at 141.986,126.373 h1
  text "PC6" at 142.113,123.96 h1
  text "PB14" at 142.24,121.674 h1
  text "PB15" at 142.24,119.007 h1
  text "GND" at 145.415,110.879 h1
  text "5V" at 57.023,103.259 h1
  text "5V" at 145.415,103.259 h1
  text "GND" at 56.261,96.02 h1
  text "GND" at 145.923,86.114 h1
  text "5V" at 145.923,78.748 h1
  text "GYRO" at 95.504,78.494 h1
  text "5V" at 57.15,77.732 h1
  text "PC9" at 74.549,76.562 h0.8
  text "PC7" at 81.28,76.435 h0.8
  text "RX" at 93.218,75.7 h1
  text "CODE" at 109.474,75.446 h1
  text "P5" at 119.253,75.192 h1
  text "PC8" at 135.89,74.403 h0.8
  text "5V" at 74.422,73.795 h1
  text "5V" at 81.407,73.795 h1
  text "TX" at 93.091,73.287 h1
  text "P4" at 119.253,72.525 h1
  text "P5" at 113.284,72.271 h1
  text "5V" at 135.89,71.89 h1
  text "GND" at 74.295,71.255 h1
  text "GND" at 81.153,71.128 h1
  text "5V" at 92.964,70.747 h1
  text "GND" at 56.134,70.366 h1
  text "P9" at 119.253,70.112 h1
  text "P4" at 113.157,69.858 h1
  text "GND" at 135.763,69.35 h1
  text "GND" at 92.837,68.08 h1
  text "P1" at 119.507,67.445 h1
  text "P3" at 113.157,67.318 h1
  text "5V" at 119.253,65.032 h1
  text "5V" at 112.903,64.9 h1
  text "O2" at 78.359,63.254 h1
  text "GND" at 119.286,62.47 h1
  text "GND" at 112.91,62.292 h1
  text "O1" at 56.787,61.421 h1 r53
  text "INT4" at 85.617,59.944 h0.8 r90
  text "INT1" at 93.237,59.944 h0.8 r90
  text "ENB" at 83.177,59.817 h1 r90
  text "INT3" at 88.284,59.817 h0.8 r90
  text "INT2" at 90.824,59.69 h0.8 r90
  text "ENA" at 96.258,59.563 h1 r90
  text "INT2" at 68.726,58.039 h0.8 r90
  text "INT1" at 71.266,58.039 h0.8 r90
  text "ENB" at 61.079,57.912 h1 r90
  text "INT4" at 63.646,57.912 h0.8 r90
  text "INT3" at 66.186,57.912 h0.8 r90
  text "ENA" at 74.287,57.658 h1 r90
  text "OUT2" at 78.359,54.872 h1
  text "OUT1" at 54.483,54.745 h1
  text "1" at 67.691,53.713 h1 r180
  text "3" at 62.103,53.586 h1 r180
  text "2" at 64.897,53.586 h1 r180
  text "4" at 59.857,53.491 h1 r144
  text "2" at 89.027,53.459 h1 r180
  text "1" at 91.567,53.459 h1 r180
  text "4" at 83.987,53.364 h1 r144
  text "3" at 86.36,53.332 h1 r180

## Text inside footprints (layer, text, board x,y; h text height)
SCREAM: Top Overlay "GND" at 128.397,65.659 h0.76; Top Overlay "RX" at 128.397,70.866 h0.76; Top Overlay "TX" at 128.397,73.406 h0.76; Top Overlay "5V" at 128.143,68.326 h0.76
陀螺仪1: Top Overlay "GND" at 99.314,68.08 h1; Top Overlay "RX" at 99.695,70.866 h0.76; Top Overlay "TX" at 99.441,73.406 h0.76; Top Overlay "3V3" at 99.314,75.819 h0.76